# Altium PCB ExtendBoardV1.1.PcbDoc
Units mil, origin at the board's own origin, x right, y up, seen from the top; angles counter-clockwise.
Board outline 1200.79 x 1031.5 mil, 2 copper layers (Top1, Bottom4), stack 46.457 mil thick; 4 components, 10 nets, 27 pads, 0 vias.
Unrouted connection lines stored in the file: 56.
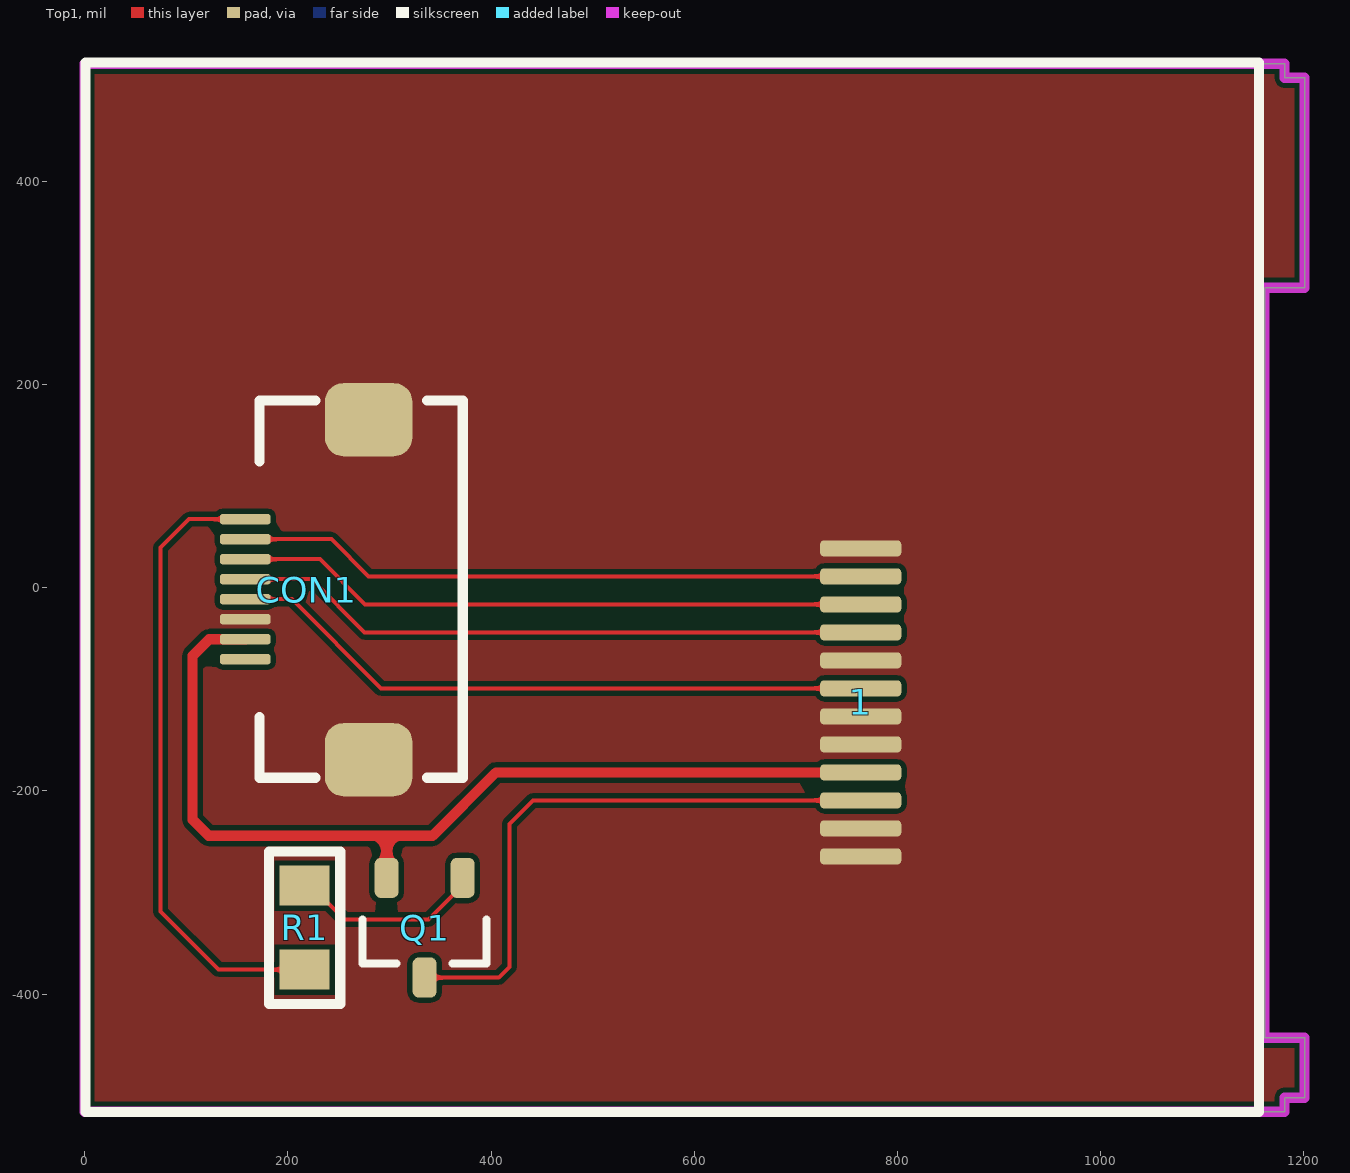
[diagram p0: Top1 view]
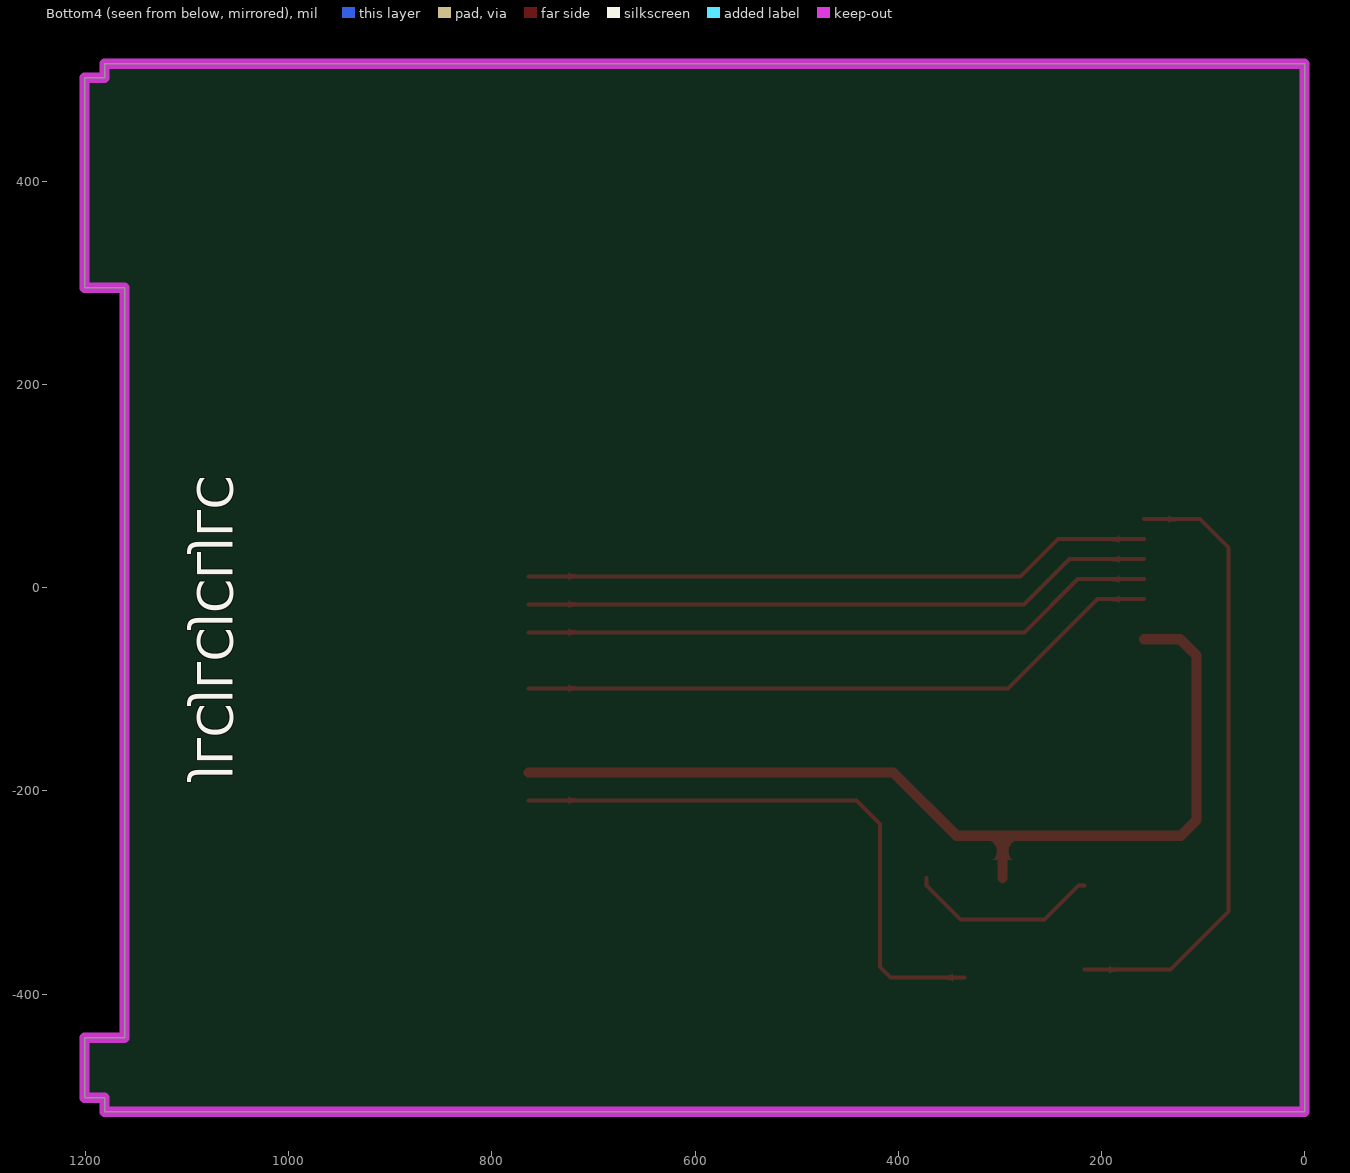
[diagram p1: Bottom4 view, seen from below]
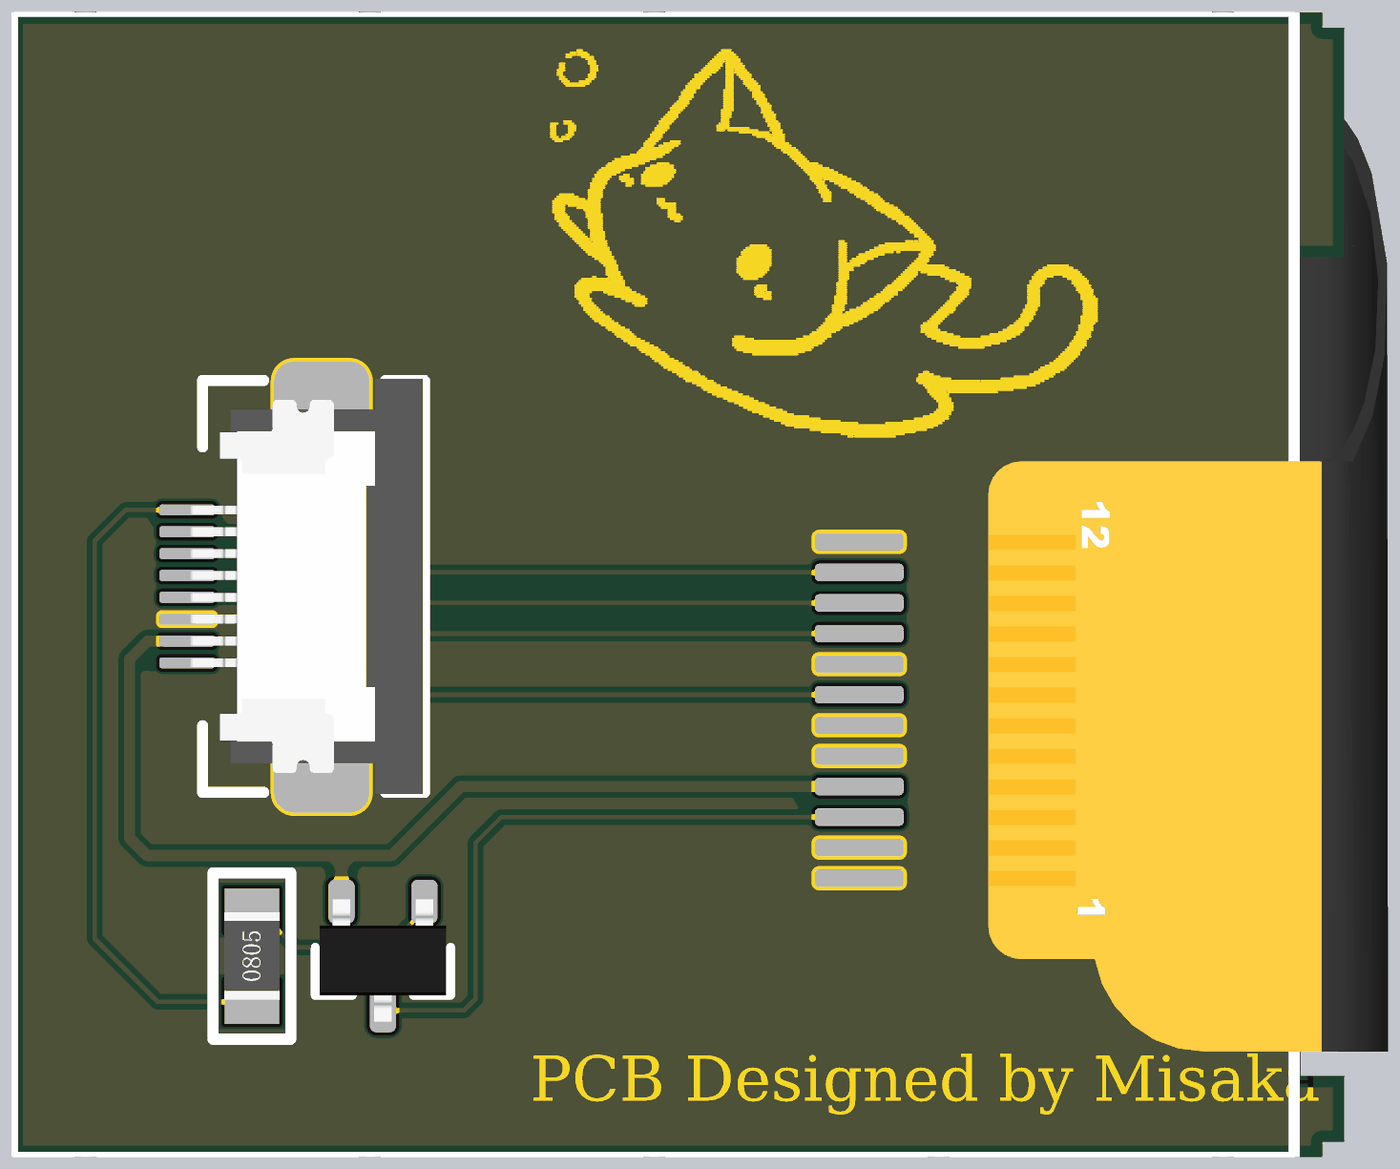
[diagram p2: 3D render of the assembled board from above, using the file's embedded part models]

## Layer stack, top to bottom
Top Solder: solder mask 0.3937, Solder Resist, Dk 3.5
Top1: signal copper 1.5748
Dielectric 2: core 43.3071, PP-006, Dk 4.2
Bottom4: signal copper 1.5748
Bottom Solder: solder mask 0.3937, Solder Resist, Dk 3.5

## Board outline
0,-515.75 0,515.75 1181.1,515.75 1181.1,501.97 1200.79,501.97 1200.79,295.28 1161.42,295.28 1161.42,-442.91 1200.79,-442.91 1200.79,-501.97 1181.1,-501.97 1181.1,-515.75

## Design rules (kind name [scope] priority, off if disabled: settings)
Clearance [All] p1: gap=5 ignorepadtopadclearanceinfootprint=FALSE
ComponentClearance [All] p1: gap=0 collisioncheckmode=3 verticalgap=0 showdistances=FALSE
DiffPairsRouting [All] p1: maxlimit=9 minlimit=9 mostfreqgap=9 toplayer_minwidth=4 toplayer_maxwidth=4 toplayer_prefwidth=4 bottomlayer_minwidth=4 bottomlayer_maxwidth=4 bottomlayer_prefwidth=4 maxuncoupledlength=500
FanoutControl Fanout_BGA [All] p1: bgadir=Out bgaviamode=Centered fanoutstyle=Auto fanoutdirection=Alternating viagrid=1 // Fanout_BGA (Default Rule)
HoleSize [All] p1: absolutevalues=TRUE maxlimit=10000 minlimit=8 maxpercent=80.000 minpercent=20.000
MinimumSolderMaskSliver [All] p1 off: minsoldermaskwidth=2
PlaneClearance [All] p1: clearance=8
PlaneConnect [All] p1: planeconnectstyle=Direct reliefexpansion=20 reliefentries=4 reliefconductorwidth=10 reliefairgap=10
PolygonConnect [All] p1: connectstyle=Direct reliefconductorwidth=10 reliefentries=4 polygonreliefangle="90 Angle" airgapwidth=10
RoutingVias [All] p1: holewidth=8 width=16 viastyle="Through Hole" minholewidth=6 minwidth=12 maxholewidth=28 maxwidth=50
SilkToBoardRegionClearance [All] p1 off:
SilkToSilkClearance [All] p1: silktosilkclearance=0
SilkToSolderMaskClearance [IsPad] p1: minsilkscreentomaskgap=0 clearancetoexposedcopper=TRUE
SolderMaskExpansion [All] p1: expansion=3 istentingtop=FALSE
Width [All] p1: maxlimit=10000 minlimit=4 preferedwidth=4
20 further rules are at their usual default settings.

## Classes and differential pairs
component class Main: 1 CON1 Q1

## Components (designator, comment, footprint, x,y, rotation, side; value= is the part's Value field where it differs from the comment)
1 "LCD-240x240" LCD-240X240-NOHOLE 675,17.5 r270 bottom locked
CON1 "FFC_0.5_8" FFC_0.5_8 247.14,-1.5 r90 top
Q1 "AO3415A" SOT23-3 334.65,-334.65 r270 top
R1 "1K" 0805 216.54,-334.65 r90 top

## Footprints (in the part's own frame and the unit in brackets; to place one, negate y for a bottom-side part, rotate by r counter-clockwise, add the part's x,y. Pads: shape width x height; smd on the part's side, far side on the other; paste and mask are expansions set on the pad)
0805 [mm]
  rect 1x1.25 smd: 1(-1.05,0) 2(1.05,0)
  silkscreen extent -1.91,-0.89 1.91,0.89, body extent -1,-0.63 1,0.63, height 0.55
FFC_0.5_8 [mil]
  rrect50% 72x86 smd: 0(-167.79,-32.39) 0(166.85,-32.39)
  rrect50% 10x50 smd: 1(-68.9,89) 2(-49.21,89) 3(-29.53,89) 4(-9.84,89) 5(9.84,89) 6(29.53,89) 7(49.21,89) 8(68.9,89)
  silkscreen extent -186,-125 186,75, body extent -187,-124 187,87, height 82
LCD-240X240-NOHOLE [mil]
  rrect50% 15.75x80 smd far side: 1(282,-88.9) 2(254.44,-88.9) 3(226.88,-88.9) 4(199.32,-88.9) 5(171.76,-88.9) 6(144.2,-88.9) 7(116.65,-88.9) 8(89.09,-88.9) 9(61.53,-88.9) 10(33.97,-88.9) 11(6.41,-88.9) 12(-21.15,-88.9)
  body extent -499,-565 534,673, height 20
SOT23-3 [mm] "SOT23, 3-Leads, Body 3.1x3.0mm (max), Pitch 0.95mm, IPC Medium Density"
  rrect50% 1x0.6 smd: 1(-1.246,0.95) 2(-1.246,-0.95) 3(1.246,0)
  silkscreen extent -0.2,-1.55 0.9,1.55, body extent -1.3,-1.45 1.5,1.45, height 1.2

## Part data
1: "显示屏"
CON1: "FFC", System=Connector
Q1: "MOSFET", LatestRevisionDate=17-Jul-2002, LatestRevisionNote="Re-released for DXP Platform.", PackageDescription="TO, Flat Index; 3 In-Line, Axial Leads; Body Dia. 4.6mm; Lead Dia. 0.5 mm (max)", PackageReference=E3, PackageVersion=1995/1996, Published=8-Jun-2000, Publisher="Altium Limited"

## Nets (pads, with @x,y where several pads share a name; then routed paths per layer and width w, separated by ;. In a path a pad name is that pad's centre, name@x,y a point inside that pad or via, vN(x,y) a via of type N, cw(c..) or ccw(c..) an arc to the next point about the centre after c; other vN are vias at no path point)
3V3: 1.4 CON1.2 Q1.2 | length 951.4
  Top1 w10: CON1.2 122.52,-50.71 106.3,-66.93 106.3,-228.35 122.05,-244.09 297.24,-244.09 ; Q1.2 297.24,-244.09 ; 1.4 404.79,-181.82 342.52,-244.09 297.24,-244.09
DC: 1.7 CON1.4 | length 642.1
  Top1 w4: CON1.4 203.98,-11.34 291.79,-99.15 1.7
GND: 1.1 1.2 1.5 1.6 1.8 1.12 CON1.0 CON1.3
LCD_BL: CON1.8 R1.1 | length 618.6
  Top1 w4: CON1.8 102.83,67.4 74.8,39.37 74.8,-318.9 131.89,-375.98 R1.1
LCD_BL_VCC: 1.3 Q1.3 | length 583.9
  Top1 w4: Q1.3 407.64,-383.7 418.14,-373.2 418.14,-232.5 441.26,-209.38 1.3
MOSI: 1.10 CON1.6 | length 624.2
  Top1 w4: CON1.6 231.61,28.03 276.11,-16.47 1.10
NetQ1_1: Q1.1 R1.2 | length 191
  Top1 w4: R1.2 222.44,-293.31 255.91,-326.77 338.58,-326.77 372.05,-293.31 Q1.1
RES: 1.11 CON1.7 | length 620.9
  Top1 w4: CON1.7 242.93,47.71 279.55,11.09 1.11
SCK: 1.9 CON1.5 | length 627.4
  Top1 w4: CON1.5 223.3,8.34 275.67,-44.03 1.9
VDD_5V: CON1.1

## Polygon pours and split planes (outlines as drawn)
GND on Top1 "GND" (solid, remove dead copper, pour order 0): 0,515.75 1200.79,515.75 1200.79,-515.75 0,-515.75

## Keep-outs
Keep-Out Layer:
  the board outline again, w10

## Silkscreen, mask and mechanical layers (free items; w line width, h text height)
Bottom Overlay:
  text "JLCJLCJCLJLC" at 1101.88,-189.2 h60 r90
Top Solder:
  drawing of 667 lines, arcs and shapes, not listed
  text "PCB Designed by Misaka" at 467.28,-485.02 h80
Mechanical 1:
  the board outline again, w10